# Altium PCB WiFan.PcbDoc
Units mil, origin at the board's own origin, x right, y up, seen from the top; angles counter-clockwise.
Board outline 1900 x 3120 mil, 2 copper layers (Top Layer, Bottom Layer), stack 65.1 mil thick; 24 components, 15 nets, 91 pads, 63 vias.
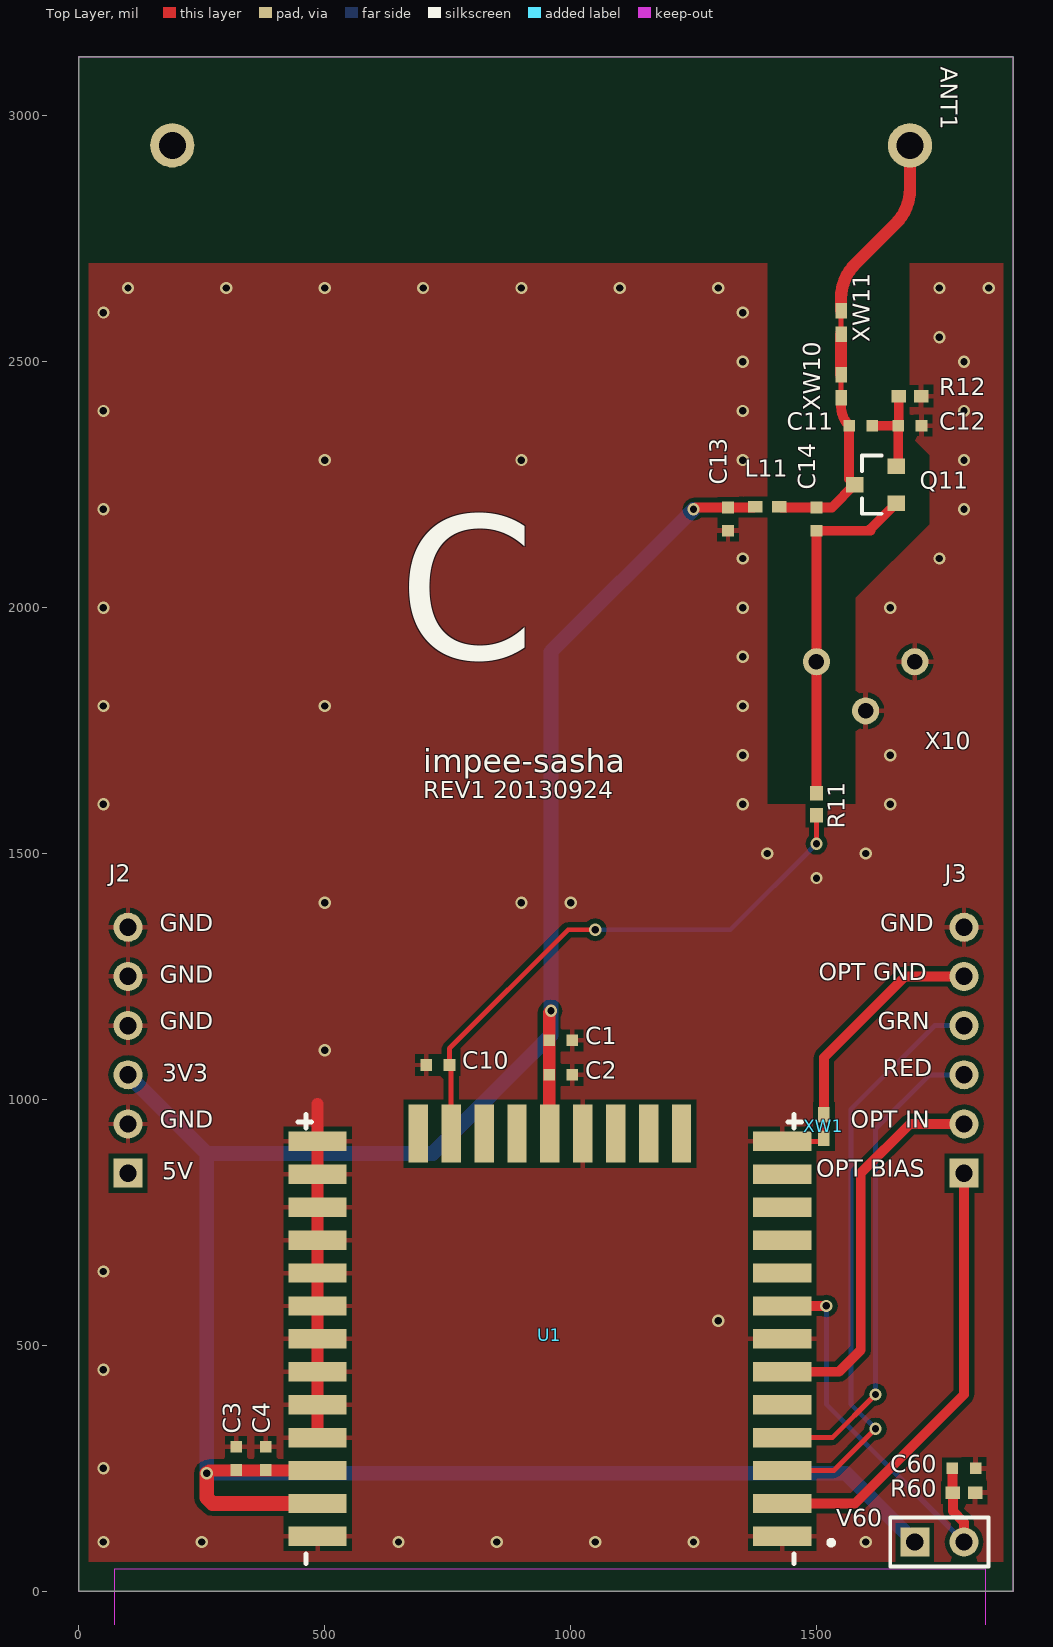
[diagram p0: Top Layer view]
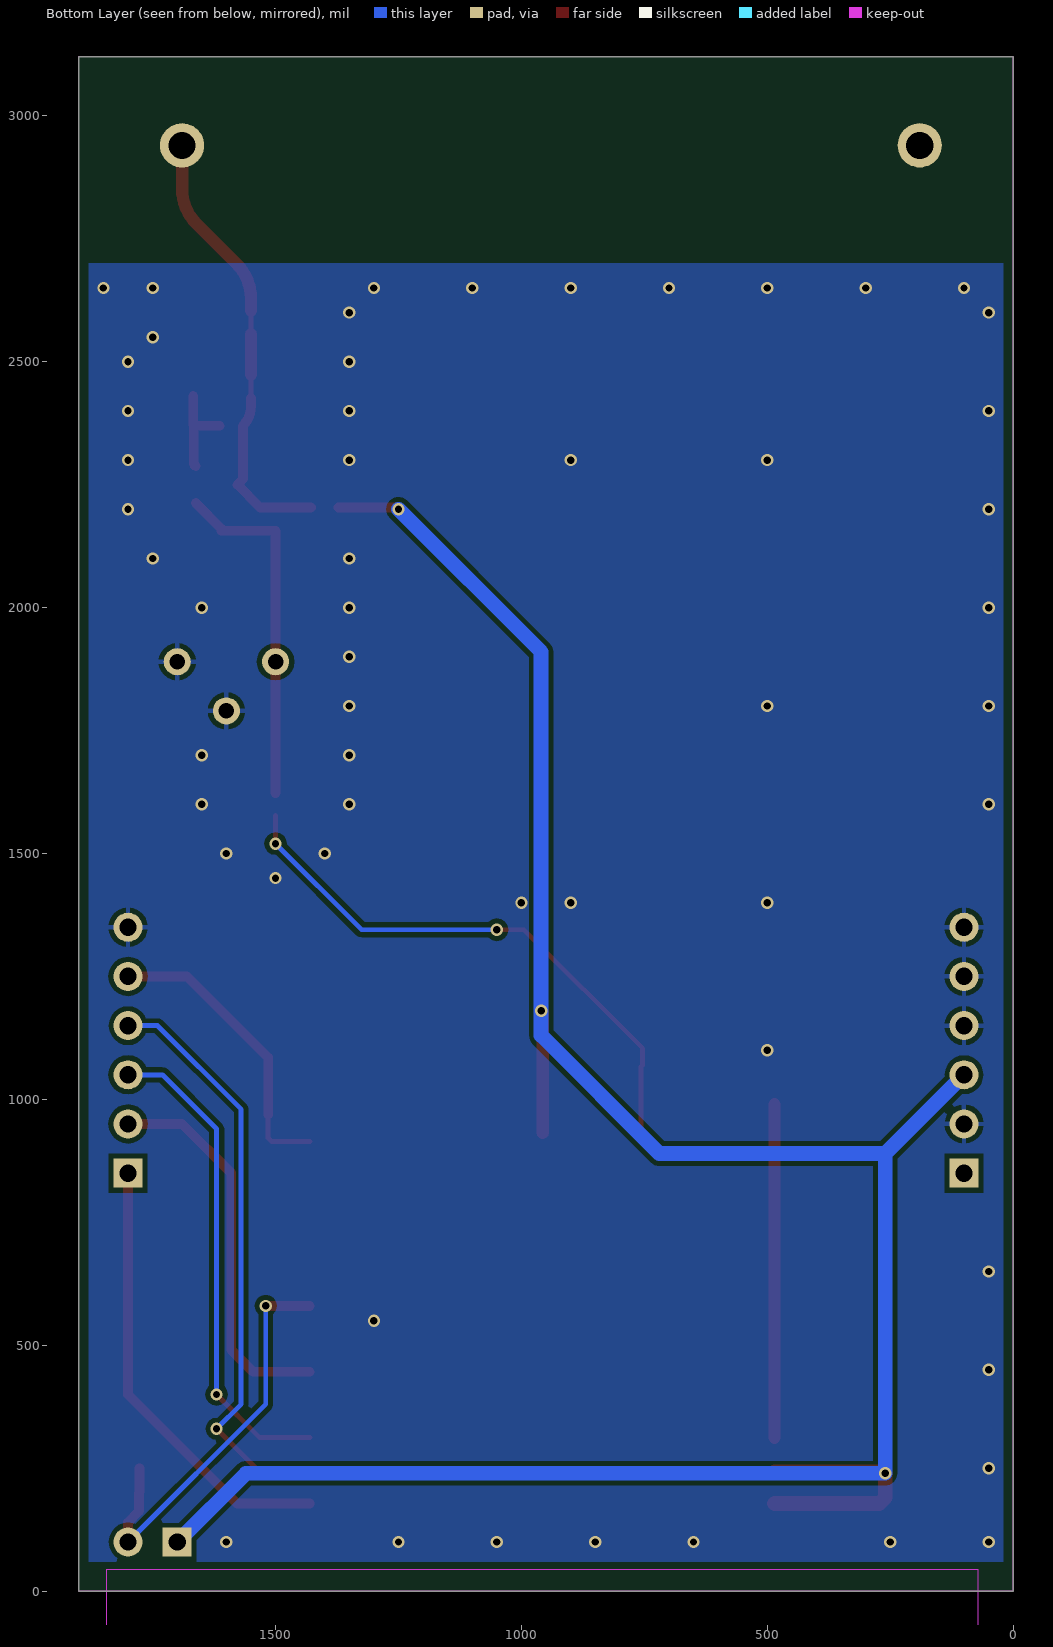
[diagram p1: Bottom Layer view, seen from below]
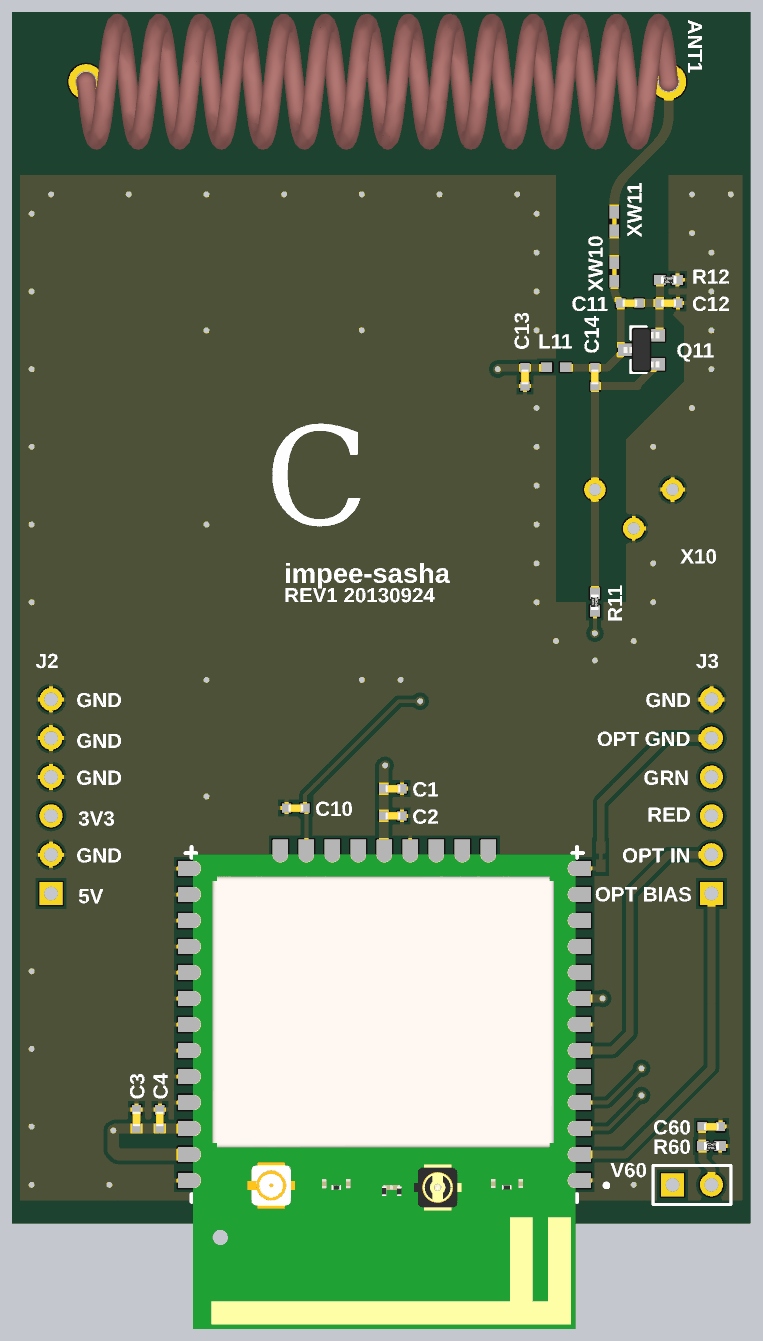
[diagram p2: 3D render of the assembled board from above, using the file's embedded part models]

## Layer stack, top to bottom
Top Layer: signal copper 1.4
Dielectric: core 62.3, FR-4, Dk 4.8
Bottom Layer: signal copper 1.4

## Board outline
0,0 1900,0 1900,3120 0,3120

## Design rules (kind name [scope] priority, off if disabled: settings)
Clearance Clearance_1 [All] p1: gap=10
ComponentClearance [All] p1: gap=9 collisioncheckmode=3 verticalgap=10 showdistances=FALSE
MinimumSolderMaskSliver [All] p1: minsoldermaskwidth=1.5
PolygonConnect PolygonViaConnect [IsPolygon vs IsVia Or InNet('3V3')] p1: connectstyle=Direct reliefconductorwidth=10 reliefentries=4 polygonreliefangle="90 Angle" airgapwidth=10
PolygonConnect [All] p2: connectstyle=Relief reliefconductorwidth=10 reliefentries=4 polygonreliefangle="90 Angle" airgapwidth=10
RoutingVias [All] p1: holewidth=15 width=25 viastyle="Through Hole" minholewidth=10 minwidth=15 maxholewidth=15 maxwidth=25
SilkToSilkClearance [All] p1: silktosilkclearance=2.5
SilkToSolderMaskClearance [IsPad] p1: minsilkscreentomaskgap=2.5 clearancetoexposedcopper=TRUE
SolderMaskExpansion [All] p1: expansion=4
Width [All] p1: maxlimit=50 minlimit=7 preferedwidth=10
24 further rules are at their usual default settings.

## Classes and differential pairs
net class RF: NetANT1_1 NetC11_1 NetC11_2 NetC14_2 NetXW10_2

## Components (designator, comment, footprint, x,y, rotation, side; value= is the part's Value field where it differs from the comment)
ANT1 "ANT" ANT-433-HETH 1690,2940 r0 top
C1 "Ceramic Capacitor" CAPC1005X07N 980,1120 r180 top
C2 "Ceramic Capacitor" CAPC1005X07N 980,1050 r180 top
C3 "Ceramic Capacitor" CAPC1005X07N 320,270 r270 top
C4 "Ceramic Capacitor" CAPC1005X07N 380,270 r270 top
C10 "Ceramic Capacitor" CAPC1005X07N 730,1070 r0 top
C11 "Ceramic Capacitor" CAPC1005X07N 1590,2370 r180 top
C12 "Ceramic Capacitor" CAPC1005X07N 1690,2370 r180 top
C13 "Ceramic Capacitor" CAPC1005X07N 1320,2180 r90 top
C14 "Ceramic Capacitor" CAPC1005X07N 1500,2180 r270 top
C60 "Ceramic Capacitor" CAPC1005X07N 1800,250 r180 top
J2 "Header" HDR254P1X6-N 100,850 r90 top
J3 "Header" HDR254P1X6-N 1800,850 r90 top
L11 "Inductor" INDC1005X06N 1400,2205 r0 top
Q11 "NPN Bipolar Transistor" SOT95P300X130-3N 1620,2250 r180 top
R11 "Resistor" RESC1005X04N 1500,1600 r90 top
R12 "Resistor" RESC1005X04N 1690,2430 r180 top
R60 "Resistor" RESC1005X04N 1800,200 r180 top
U1 "imp module" IMP_MODULE 1450,950 r180 top
V60 "VARISTOR" HDR1X2 1700,100 r0 top
X10 "RESONATOR-3N" TO39-3 1600,1890 r90 top
XW1 "XW Link" XW1005-COVERED 1515,945 r90 top net-tie
XW10 "XW Link" XW1005-UNCOVERED 1550,2450 r90 top net-tie
XW11 "XW Link" XW1005-UNCOVERED 1550,2580 r90 top net-tie

## Footprints (in the part's own frame and the unit in brackets; to place one, negate y for a bottom-side part, rotate by r counter-clockwise, add the part's x,y. Pads: shape width x height; smd on the part's side, far side on the other; paste and mask are expansions set on the pad)
ANT-433-HETH [mil] "Antenna, Helical, 433 MHz, Through-Hole"
  round 90 hole 55 mask+3.94: 1(0,0) 2(-1500,0)
  body extent -1525,-175 25,175, height 375
CAPC1005X07N [mm] "Chip Capacitor, 2-Leads, Body 1.0x0.5mm, IPC Medium Density"
  rect 0.6x0.6 smd: 1(-0.6,0) 2(0.6,0)
  body extent -0.5,-0.25 0.5,0.25, height 0.6
HDR1X2 [mm] "Connector; Header; 2 Position"
  rect 1.5x1.5 hole 0.9: 1(0,0)
  round 1.5 hole 0.9: 2(2.54,0)
  silkscreen extent -1.27,-1.27 3.81,1.27
HDR254P1X6-N [mm] "HDR, 2.54mm Pitch, 6-Pin"
  rect 1.5x1.5 hole 0.9: 1(0,0)
  round 1.5 hole 0.9: 2(2.54,0) 3(5.08,0) 4(7.62,0) 5(10.16,0) 6(12.7,0)
  body extent -1.27,-1.27 13.97,1.27, height 8.54
IMP_MODULE [mm] "Imp Module, Shadow and Chase"
  rect 3x1 smd: 1(0.5,21.3) 2(0.5,19.6) 3(0.5,17.9) 4(0.5,16.2) 5(0.5,14.5) 6(0.5,12.8) 7(0.5,11.1) 8(0.5,9.4) 9(0.5,7.7) 10(0.5,6) 11(0.5,4.3) 12(0.5,2.6) 13(0.5,0.9) 23(24.5,0.9) 24(24.5,2.6) 25(24.5,4.3) 26(24.5,6) 27(24.5,7.7) 28(24.5,9.4) 29(24.5,11.1) 30(24.5,12.8) 31(24.5,14.5) 32(24.5,16.2) 33(24.5,17.9) 34(24.5,19.6) 35(24.5,21.3)
  rect 1x3 smd: 14(5.7,0.5) 15(7.4,0.5) 16(9.1,0.5) 17(10.8,0.5) 18(12.5,0.5) 19(14.2,0.5) 20(15.9,0.5) 21(17.6,0.5) 22(19.3,0.5)
  Keep-Out Layer region: -10,23 35,23 35,41 -10,41
  silkscreen extent -2.15,-0.5 25.5,22.7, body extent 0,0 25,31, height 1.8
INDC1005X06N [mm] "Chip Inductor, 2-Leads, Body 1.0x0.5mm, IPC Medium Density"
  rect 0.75x0.6 smd: 1(-0.625,0) 2(0.625,0)
  body extent -0.53,-0.28 0.53,0.27, height 0.55
RESC1005X04N [mm] "Chip Resistor, 2-Leads, Body 1.0x0.5mm, IPC Medium Density"
  rect 0.75x0.65 smd: 1(-0.575,0) 2(0.575,0)
  body extent -0.5,-0.25 0.5,0.25, height 0.35
SOT95P300X130-3N [mm] "SOT-23"
  rect 0.9x0.8 smd: 1(-1.075,0.95) 2(-1.075,-0.95) 3(1.075,0)
  silkscreen extent -0.3,-1.5 0.7,1.5, body extent -1.17,-1.45 1.17,1.47, height 1
TO39-3 [mm] "TO39-3"
  round 1.4 hole 0.8: 1(0,2.54) 2(-2.54,0) 3(0,-2.54)
  body extent -4.66,-4.69 4.7,4.69, height 3.28
XW1005-COVERED [mm] "XWLink for 0402 (EIA), No Soldermask Opening"
  rect 0.8x0.6 smd paste-10 mask-10: 1(-0.6,0) 2(0.6,0)
  Top Layer lines w0.254: -0.5,0 0.5,0
XW1005-UNCOVERED [mm] "XWLink for 0402 (EIA) With Soldermask Opening"
  rect 0.8x0.6 smd: 1(-0.6,0) 2(0.6,0)
  Top Layer lines w0.254: -0.5,0 0.5,0

## Part data
ANT1: library part ANT00001, "Antenna, 433 MHz, through-hole, helical, air core"
C1 C3: library part CAPC00005, "CAP,X5R,1.0uF,10%,6.3V, 0402,#"
C2 C4 C10: library part CAPC00043, "CAP,C0G,100pF,5%,50V,0402"
C11: library part CAPC00080, "CAP,NPO,2.2pF, 0402, 50V"
C12: library part CAPC00041, "CAP,C0G,12pF,5%,50V,0402#"
C13: library part CAPC00047, "CAP,C0G,470pF,5%,50V,0402"
C14: library part CAPC00081, "CAP,NPO,1pF, 0402, 50V"
C60: library part CAPC00002, "CAP,X5R,0.1uF,10%,6.3V, 0402,#"
J2 J3: library part HDR00020, "Spacer, 1x6 Pin, 2.54mm Pitch, 0.661\" Stack Height, Vertical, Through Hole"
L11: library part IND00036, "IND, 22nH, 5%, 300mA, 600 mOhm, 0402"
Q11: library part NPN00003, "NPN,15V, 25mA, 2.8GHz, SOT23"
R11: library part RES00001, "RES,100k,5%,0.063W,0402,#"
R12: library part RES00024, "RES,100,1%,0.063W,0402,#"
R60: library part RES00020, "RES,10K,1%,0.063W,0402,#"
U1: library part MOD00002, "Module, Electric Imp Solder Down with Antenna"
V60: library part NTC00008, "Thermistor, NTC, 10K, 1%, Radial"
X10: library part RESONATOR00001, "Resonator,SAW,303.825MHz,TO39-3"
XW1: library part ELEC00008, "Short two wires together"
XW10 XW11: library part ELEC00007, "Short two wires together"

## Via types
v1: diameter 25, hole 15, Top Layer to Bottom Layer, tented both sides, 63 vias

## Nets (pads, with @x,y where several pads share a name; then routed paths per layer and width w, separated by ;. In a path a pad name is that pad's centre, name@x,y a point inside that pad or via, vN(x,y) a via of type N, cw(c..) or ccw(c..) an arc to the next point about the centre after c; other vN are vias at no path point)
3V3: C1.2 C2.2 C3.2 C4.2 C13.2 J2.3 L11.1 U1.18 U1.33 U1.34 V60.1 | length 5246.8
  Top Layer w20: U1.18@956.38,931.81 U1.18 ; v1(1250,2200) 1253.62,2203.62 C13.2 L11.1@1371.77,2203.62
  Top Layer w25: v1(260,240) 265.28,245.28 U1.33 ; U1.18@956.38,931.81 C2.2 C1.2 956.38,1176.38 v1(960,1180)
  Top Layer w30: v1(260,240) 260,190 271.65,178.35 U1.34
  Bottom Layer w30: J2.3 260,890 ; v1(1250,2200) 960,1910 v1(960,1180) 960,1130 720,890 260,890 ; V60.1 1560,240 v1(260,240) 260,890
5V: J2.1
GND: C1.1 C2.1 C3.1 C4.1 C10.1 C12.1 C13.1 C60.1 J2.2 J2.4 J2.5 J2.6 J3.6 R12.1 R60.1 U1.1 U1.7 U1.13 U1.17 U1.23 U1.24 U1.25 U1.26 U1.27 U1.28 U1.29 U1.30 U1.31 U1.32 U1.35 X10.2 X10.3 XW1.1 | length 765.3
  Top Layer w10: U1.13 1508.19,914.57 XW1.1
  Top Layer w25: U1.32 U1.31 U1.30 U1.29 U1.28 U1.27 U1.26 U1.25 U1.24 485.43,990
  other v1: 50,100 250,100 650,100 850,100 1050,100 1250,100 1600,100 50,250 50,450 1300,550 50,650 500,1100 500,1400 900,1400 1000,1400 1500,1450 1400,1500 1600,1500 50,1600 1350,1600 1650,1600 1350,1700 1650,1700 50,1800 500,1800 1350,1800 1350,1900 50,2000 1350,2000 1650,2000 1350,2100 1750,2100 50,2200 1800,2200 500,2300 900,2300 1350,2300 1800,2300 50,2400 1350,2400 1800,2400 1350,2500 1800,2500 1750,2550 50,2600 1350,2600 100,2650 300,2650 500,2650 700,2650 900,2650 1100,2650 1300,2650 1750,2650 1850,2650
MOSI: C10.2 R11.1 U1.21 | length 1151
  Top Layer w10: U1.21 757.09,1066.54 C10.2 753.62,1103.62 995,1345 v1(1050,1345) ; v1(1500,1520) R11.1
  Bottom Layer w10: v1(1050,1345) 1325,1345 v1(1500,1520)
NetANT1_1: ANT1.1 XW11.2 | length 385.8
  Top Layer w25: XW11.2 1550,2628.58 cw(c1650,2628.58) 1579.29,2699.29 1660.71,2780.71 ccw(c1590,2851.42) 1690,2851.42 ANT1.1
NetC11_1: C11.1 C12.2 Q11.2 R12.2 | length 197.4
  Top Layer w20: C11.1 C12.2 ; Q11.2 1666.38,2291.46 C12.2 ; R12.2 1667.36,2370.98 C12.2
NetC11_2: C11.2 C14.1 L11.2 Q11.3 XW10.1 | length 354.1
  Top Layer w20: L11.2@1428.23,2203.62 C14.1 1531.3,2203.62 Q11.3 1566.38,2261.3 C11.2 cw(c1605.92,2409.54) 1550,2409.54 XW10.1
NetC14_2: C14.2 Q11.1 R11.2 X10.1 | length 721.6
  Top Layer w20: R11.2 X10.1 C14.2 1610,2156.38 1610,2160.28 Q11.1
NetJ3_1: J3.1 U1.2 | length 911.5
  Top Layer w20: U1.2 1578.35,178.35 1800,400 J3.1
NetJ3_2: J3.2 U1.6 | length 789.3
  Top Layer w20: U1.6 1546.06,446.06 1590,490 1590,850 1690,950 J3.2
NetJ3_3: J3.3 U1.4 | length 991.6
  Top Layer w10: U1.4 1532.2,312.2 v1(1620,400)
  Bottom Layer w10: v1(1620,400) 1620,940 1730,1050 J3.3
NetJ3_4: J3.4 U1.3 | length 1195.9
  Top Layer w10: U1.3 1535.28,245.28 v1(1620,330)
  Bottom Layer w10: v1(1620,330) 1570,380 1570,980 1740,1150 J3.4
NetXW10_2: XW10.2 XW11.1 | length 82.8
  Top Layer w25: XW10.2 XW11.1
OPTO_GND: J3.5 XW1.2 | length 469.7
  Top Layer w20: XW1.2 1515,1085 1680,1250 J3.5
TEMP_SENSE: C60.2 R60.2 U1.8 V60.2 | length 845.5
  Top Layer w20: U1.8 1519.92,579.92 v1(1520,580) ; C60.2 1776.38,200.98 R60.2 1777.36,162.64 1800,140 V60.2
  Bottom Layer w10: v1(1520,580) 1520,380 V60.2
pads on no net: ANT1.2 U1.5 U1.9 U1.10 U1.11 U1.12 U1.14 U1.15 U1.16 U1.19 U1.20 U1.22

## Polygon pours and split planes (outlines as drawn)
GND on Bottom Layer "BOT_GND" (solid, remove dead copper, pour order 4): 20,2700 20,60 1880,60 1880,2700
GND on Top Layer "TOP_GND" (solid, remove dead copper, pour order 3): 20,2700 20,60 1880,60 1880,2700

## Keep-outs
Keep-Out Layer:
  the board outline again, w1

## Other copper
Top Layer:
  pour cut-out: 1400,2700 1400,1600 1580,1600 1580,2020 1730,2170 1730,2310 1690,2350 1690,2700

## Silkscreen, mask and mechanical layers (free items; w line width, h text height)
Top Overlay:
  text "C" at 650,1800 h500
  text "impee-sasha" at 700,1650 h80
  text "REV1 20130924" at 700,1600 h60
  text "GND" at 165,1330 h60
  text "GND" at 1630,1330 h60
  text "OPT GND" at 1505,1230 h60
  text "GND" at 165,1225 h60
  text "GND" at 165,1130 h60
  text "GRN" at 1625,1130 h60
  text "RED" at 1635,1035 h60
  text "3V3" at 170,1025 h60
  text "GND" at 165,930 h60
  text "OPT IN" at 1570,930 h60
  text "OPT BIAS" at 1500,830 h60
  text "5V" at 170,825 h60

## Text inside footprints (layer, text, board x,y; h text height)
U1: Mechanical 1 "NO" at 1036.61,497.24 h78.74 r180; Mechanical 1 "EXPOSED" at 1146.85,575.98 h78.74 r180; Mechanical 1 "COPPER" at 1127.17,654.72 h78.74 r180